# Altium PCB MasterBoard.PcbDoc
Units mm, origin at the board's own origin, x right, y up, seen from the top; angles counter-clockwise.
Board outline 86.59 x 35.41 mm, 2 copper layers (Top Layer, Bottom Layer); 15 components, 18 nets, 76 pads, 11 vias.
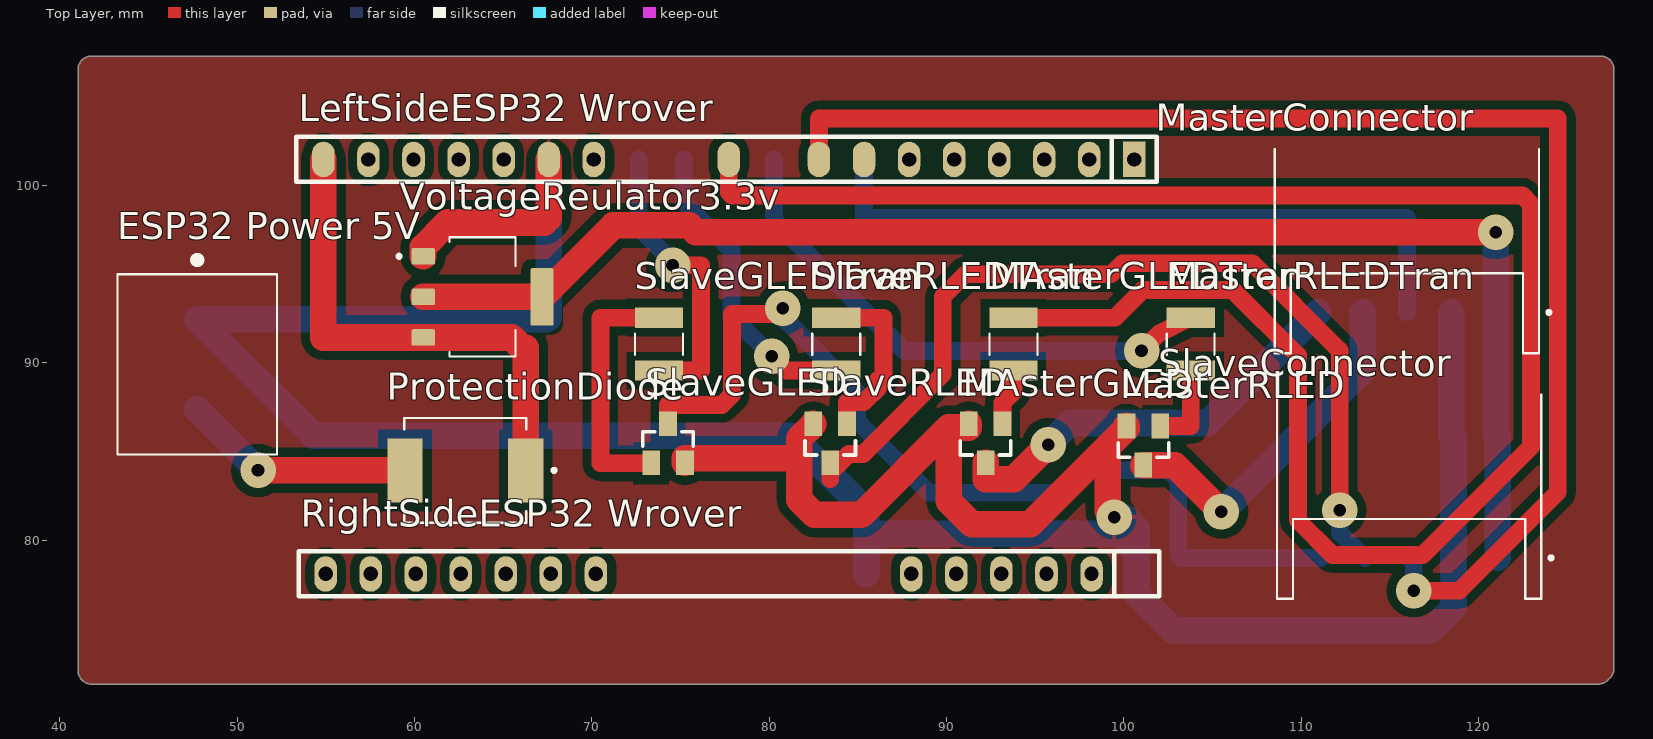
[diagram p0: Top Layer view]
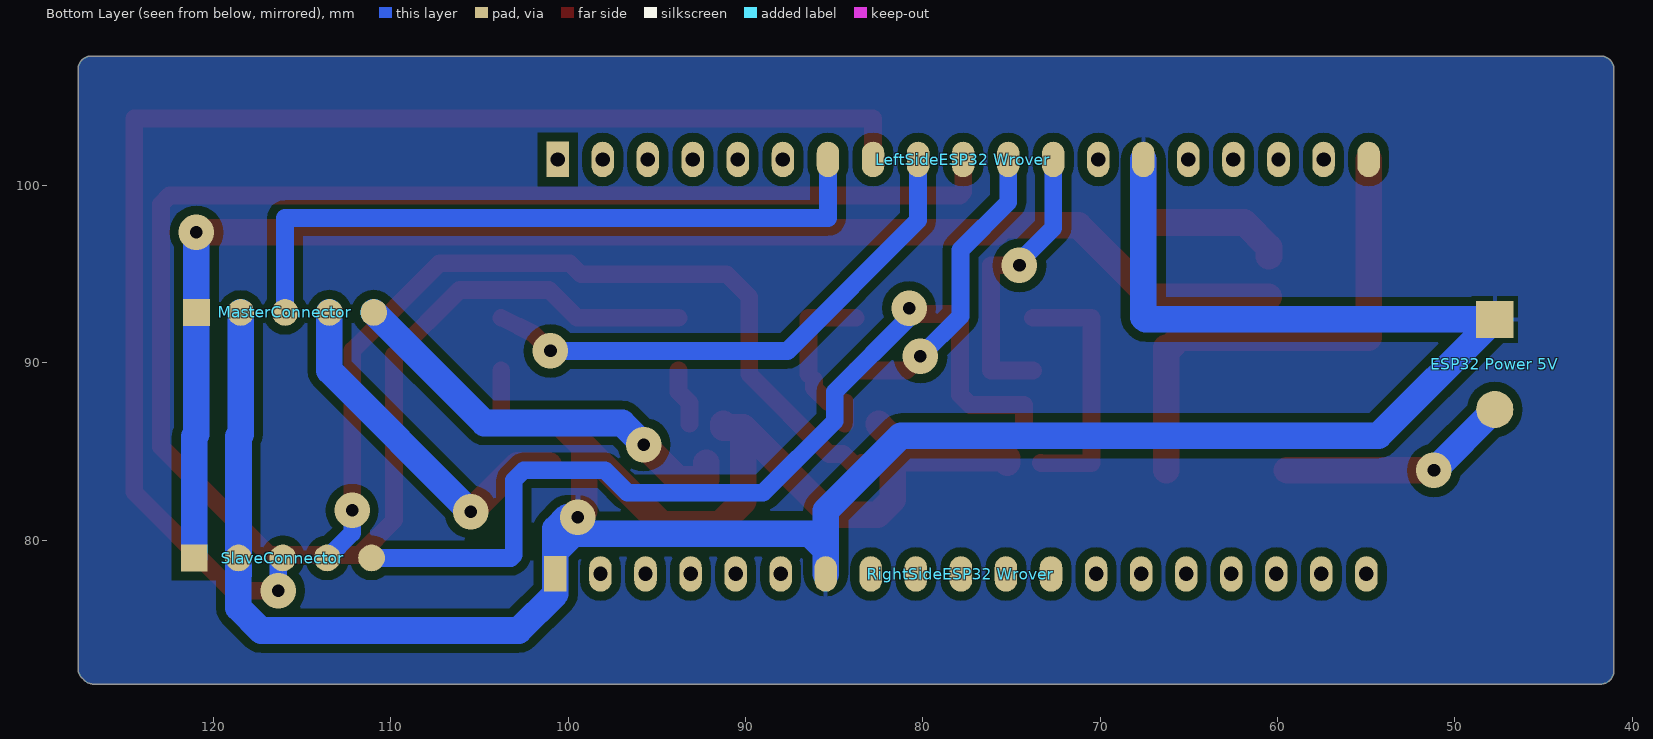
[diagram p1: Bottom Layer view, seen from below]
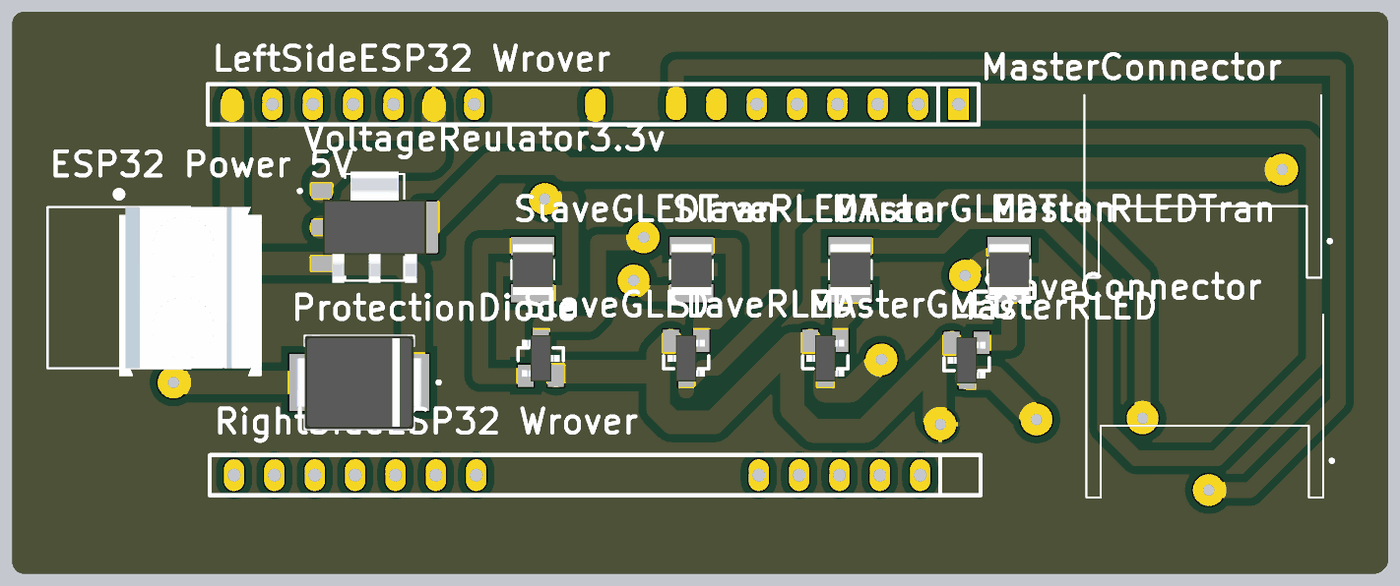
[diagram p2: 3D render of the assembled board from above, using the file's embedded part models]

## Layer stack, top to bottom
Top Solder: solder mask 0.0102, Solder Resist, Dk 3.5
Top Layer: signal copper 0.0356
Dielectric 1: dielectric 0.32, FR-4, Dk 4.8
Bottom Layer: signal copper 0.0356
Bottom Solder: solder mask 0.0102, Solder Resist, Dk 3.5

## Board outline
41.783,71.894 cw(c41.783,72.644) 41.033,72.644 41.033,106.553 cw(c41.783,106.553) 41.783,107.303 126.873,107.303 cw(c126.873,106.553) 127.623,106.553 127.623,72.771 cw(c126.873,72.771) 127.336,72.181 cw(c126.746,72.644) 126.746,71.894

## Design rules (kind name [scope] priority, off if disabled: settings)
Clearance [All] p1: gap=0.5 ignorepadtopadclearanceinfootprint=FALSE
PolygonConnect [All] p1: connectstyle=Relief reliefconductorwidth=0.254 reliefentries=4 polygonreliefangle="90 Angle" airgapwidth=0.254
RoomDefinition MasterBoard [InComponentClass('MasterBoard')] p1: confinementstyle=ConfineIn formatcopy=TRUE lockcomponents=FALSE outline 178.943,27.051 201.168,27.051 201.168,39.751 178.943,39.751
RoutingCorners [All] p1: cornerstyle=90-Degree minsetback=2.54 maxsetback=2.54
RoutingVias [All] p1: holewidth=0.711 width=2 viastyle="Through Hole" minholewidth=0.711 minwidth=2 maxholewidth=0.711 maxwidth=2
SolderMaskExpansion [All] p1: expansion=0.102
UnRoutedNet [All] p1: checkbadconnections=TRUE
Width +5 [InNet('+5')] p1: maxlimit=1.5 minlimit=1.5 preferedwidth=1.5
Width RLEDTerm [InNet('PodeMasterRLEDTerm')] p2: maxlimit=1.5 minlimit=1.5 preferedwidth=1.5
Width GLEDTerm [InNet('PodeMasterGLEDTerm')] p3: maxlimit=1.5 minlimit=1.5 preferedwidth=1.5
Width Diode5V [InNet('Diode5V')] p4: maxlimit=1.5 minlimit=1.5 preferedwidth=1.5
Width 3.3Power [InNet('3.3VPower')] p5: maxlimit=1.5 minlimit=1.5 preferedwidth=1.5
Width GND [InNet('GND')] p6: maxlimit=1.5 minlimit=1.5 preferedwidth=1.5
Width [All] p7: maxlimit=1 minlimit=1 preferedwidth=1
28 further rules are at their usual default settings.

## Components (designator, comment, footprint, x,y, rotation, side; value= is the part's Value field where it differs from the comment)
"ESP32 Power 5V" "282841-2" TE_282841-2 47.752,89.916 r270 top
"LeftSideESP32 Wrover" "LeftSideEsp" SIP19#1 100.584,101.473 r180 top
MasterConnector "S5B-XH-A" JST_S5B-XH-A 115.951,98.552 r180 top
MAsterGLED "SI2302" SOT23 92.202,85.471 r180 top
MAsterGLEDTran "ERJ-14YJ2R0U" RESC3225X70N 93.768,91.059 r270 top
MasterRLED "SI2302" SOT23 101.092,85.344 r180 top
MasterRLEDTran "ERJ-14YJ2R0U" RESC3225X70N 103.759,91.059 r270 top
ProtectionDiode "SS34" DIO_SS34 62.865,83.947 r180 top
"RightSideESP32 Wrover" "RightSideEsp" SIP19#2 100.711,78.105 r180 top
SlaveConnector "S5B-XH-A" JST_S5B-XH-A 116.078,84.709 r180 top
SlaveGLED "SI2302" SOT23 74.295,85.471 r0 top
SlaveGLEDTran "ERJ-14YJ2R0U" RESC3225X70N 73.787,91.059 r90 top
SlaveRLED "SI2302" SOT23 83.439,85.471 r180 top
SlaveRLEDTran "ERJ-14YJ2R0U" RESC3225X70N 83.778,91.059 r90 top
VoltageReulator3.3v "AMS1117" SOT229P700X180-4N 63.838,93.726 r0 top

## Footprints (in the part's own frame and the unit in brackets; to place one, negate y for a bottom-side part, rotate by r counter-clockwise, add the part's x,y. Pads: shape width x height; smd on the part's side, far side on the other; paste and mask are expansions set on the pad)
DIO_SS34 [mm]
  rect 2x3.6 smd: A(3.4,0) C(-3.4,0)
  silkscreen extent -5.1,-2.95 3.44,2.95, body extent -3.98,-2.95 3.98,2.95, height 2.65
JST_S5B-XH-A [mm]
  rect 1.508x1.508 smd far side: 1(-5,5.7)
  round 1.508 smd far side: 2(-2.5,5.7) 3(0,5.7) 4(2.5,5.7) 5(5,5.7)
  silkscreen extent -8.1,-3.5 7.45,8
RESC3225X70N [mm]
  rect 1.14x2.72 smd: 1(-1.49,0) 2(1.49,0)
  silkscreen extent -0.6,-1.35 0.6,1.35, body extent -1.6,-1.25 1.6,1.25, height 0.7
SIP19#1 [mm]
  rect 1.27x2 hole 0.813: 1(0,0)
  oval 1.27x2 hole 0.813: 2(2.54,0) 3(5.08,0) 4(7.62,0) 5(10.16,0) 6(12.7,0) 13(30.48,0) 15(35.56,0) 16(38.1,0) 17(40.64,0) 18(43.18,0)
  oval 1.27x2 all layers, no hole: 7(15.24,0) 8(17.78,0) 10(22.86,0) 14(33.02,0) 19(45.72,0)
  oval 1.27x2 smd far side: 9(20.32,0) 11(25.4,0) 12(27.94,0)
  silkscreen extent -1.27,-1.27 47.24,1.27
SIP19#2 [mm]
  rect 1.27x2 smd far side: 1(0,0)
  oval 1.27x2 hole 0.813: 2(2.54,0) 3(5.08,0) 4(7.62,0) 5(10.16,0) 6(12.7,0) 13(30.48,0) 14(33.02,0) 15(35.56,0) 16(38.1,0) 17(40.64,0) 18(43.18,0) 19(45.72,0)
  oval 1.27x2 smd far side: 7(15.24,0) 8(17.78,0) 9(20.32,0) 10(22.86,0) 11(25.4,0) 12(27.94,0)
  silkscreen extent -1.27,-1.27 47.24,1.27
SOT23 [mm]
  rect 1x1.4 smd: 1(-0.95,-1.1) 2(0.95,-1.1) 3(0,1.1)
  silkscreen extent -1.42,-0.15 1.42,0.66, body extent -1.18,-1.46 1.18,1.46, height 1.12
SOT229P700X180-4N [mm]
  rrect15% 1.31x0.93 smd: 1(-3.345,2.29) 2(-3.345,0) 3(-3.345,-2.29)
  rrect15% 1.31x3.24 smd: 4(3.345,0)
  silkscreen extent -4.8,-3.36 1.86,3.36, body extent -3.25,-3.5 3.25,3.5, height 1.8
TE_282841-2 [mm]
  rect 2.1x2.1 smd far side: 1(-2.54,0)
  round 2.1 smd far side: 2(2.54,0)
  silkscreen extent -6.09,-4.5 5.08,4.5, body extent -5.08,0 5.58,9, height 15.2

## Part data
"ESP32 Power 5V": "TERM BLOCK 2POS SIDE ENT 5.08MM", Package=None, Availability=Unavailable, MF="{'manufacturer': u'TE Connectivity'}", MP=282841-2, Price=None
"LeftSideESP32 Wrover" "RightSideESP32 Wrover": library part "HEADER 19"
MasterConnector ProtectionDiode SlaveConnector: Package=None, Availability=Unavailable, Price=None
  MasterConnector SlaveConnector: MF="{'manufacturer': u'JST'}", MP=S5B-XH-A
  ProtectionDiode: MF="{'manufacturer': u'Taiwan Semiconductor'}", MP=SS34
MAsterGLED MasterRLED SlaveGLED SlaveRLED: "MOSFET N-Channel 20 V (D-S)", Package=None, Availability=Unavailable, MF="{'manufacturer': u'Vishay Siliconix'}", MP=SI2302, Price=None
MAsterGLEDTran MasterRLEDTran SlaveGLEDTran SlaveRLEDTran: "THICK FILM RESISTOR, 1210, 2OHM, 5%, 500mW", Package=None, Availability=Unavailable, MF="{'manufacturer': u'Panasonic'}", MP=ERJ-14YJ2R0U, Price=None
VoltageReulator3.3v: "Sot223/Pkg 1-Amp 5-Volt Low Drop Out Voltage Regulatator", Package=None, Availability=Unavailable, MF="{'manufacturer': u'Advanced Monolithic Systems'}", MP=AMS1117, Price=None

## Via types
v1: diameter 2, hole 0.711, Top Layer to Bottom Layer, 11 vias

## Nets (pads, with @x,y where several pads share a name; then routed paths per layer and width w, separated by ;. In a path a pad name is that pad's centre, name@x,y a point inside that pad or via, vN(x,y) a via of type N, cw(c..) or ccw(c..) an arc to the next point about the centre after c; other vN are vias at no path point)
3.3VPower: MasterConnector.1 SlaveConnector.1 VoltageReulator3.3v.2 VoltageReulator3.3v.4 | length 80.7
  Top Layer w1.5: VoltageReulator3.3v.2 VoltageReulator3.3v.4 71.211,97.754 75.481,97.754 75.866,97.369 120.944,97.369 v1(120.951,97.362)
  Bottom Layer w1.5: v1(120.951,97.362) MasterConnector.1 120.951,85.979 121.078,85.852 SlaveConnector.1
+5: "ESP32 Power 5V.2" ProtectionDiode.A | length 13.1
  Top Layer w1.5: v1(51.181,83.947) ProtectionDiode.A
  Bottom Layer w1.5: 47.752,87.376 v1(51.181,83.947)
Diode5V: "LeftSideESP32 Wrover.19" ProtectionDiode.C VoltageReulator3.3v.3 | length 28.6
  Top Layer w1.5: 54.864,101.473 54.864,91.436 VoltageReulator3.3v.3 65.488,91.436 66.068,90.856 66.265,90.856 ProtectionDiode.C
GND: "ESP32 Power 5V.1" "LeftSideESP32 Wrover.14" "RightSideESP32 Wrover.1" "RightSideESP32 Wrover.7" MasterConnector.2 MAsterGLED.2 MasterRLED.2 SlaveConnector.2 SlaveGLED.2 SlaveRLED.2 VoltageReulator3.3v.1 | length 188
  Top Layer w1.5: VoltageReulator3.3v.1 60.477,96.016 60.477,96.52 61.874,97.917 67.31,97.917 67.564,98.171 67.564,101.473 ; SlaveGLED.2 75.245,84.633 81.686,84.633 ; SlaveRLED.2 82.489,86.538 81.686,85.735 81.686,84.633 ; MAsterGLED.2 91.252,86.36 90.119,86.36 ; v1(99.441,81.305) 99.092,81.654 99.092,85.285 ; MasterRLED.2 100.142,86.335 99.092,85.285 ; 81.686,84.633 81.686,82.296 82.55,81.432 85.192,81.432 90.119,86.36 ; 90.119,86.36 90.119,82.22 91.44,80.899 94.706,80.899 99.092,85.285
  Bottom Layer w1.5: 67.564,101.473 67.564,92.583 67.437,92.456 47.752,92.456 54.305,85.903 81.229,85.903 85.471,81.661 85.471,79.477 ; 85.471,78.105 85.471,79.477 ; v1(99.441,81.305) 100.051,81.305 100.711,80.645 100.711,79.375 ; MasterConnector.2 118.451,85.979 118.578,85.852 SlaveConnector.2 118.578,78.094 118.582,78.09 118.582,76.2 117.297,74.915 102.783,74.915 100.711,76.987 100.711,78.105 100.711,79.375 ; 85.471,79.477 86.36,80.366 99.72,80.366 100.711,79.375
PodeMasterGLED: "LeftSideESP32 Wrover.10" MAsterGLEDTran.1 | length 105
  Top Layer w1: 77.724,101.473 77.724,99.619 77.902,99.441 122.462,99.441 122.951,98.952 122.951,85.283 116.84,79.172 111.76,79.172 109.804,81.128 109.804,90.434 106.119,94.119 101.06,94.119 99.49,92.549 MAsterGLEDTran.1
PodeMasterGLEDTerm: MasterConnector.5 MAsterGLED.3 | length 23.6
  Top Layer w1.5: MAsterGLED.3 92.202,83.439 93.777,83.439 v1(95.733,85.395)
  Bottom Layer w1.5: v1(95.733,85.395) 96.952,86.614 104.713,86.614 MasterConnector.5
PodeMasterGLEDTran: MAsterGLED.1 MAsterGLEDTran.2 | length 3.3
  Top Layer w1: MAsterGLED.1 93.152,87.757 93.768,88.373 MAsterGLEDTran.2
PodeMasterMS: "LeftSideESP32 Wrover.7" MasterConnector.3 | length 39.2
  Bottom Layer w1: 85.344,101.473 85.344,98.171 115.951,98.171 MasterConnector.3
PodeMasterRLED: "LeftSideESP32 Wrover.9" MasterRLEDTran.1 | length 30.6
  Top Layer w1: v1(100.99,90.678) 101.981,91.669 MasterRLEDTran.1
  Bottom Layer w1: 80.264,101.473 80.264,98.044 87.63,90.678 v1(100.99,90.678)
PodeMasterRLEDTerm: MasterConnector.4 MasterRLED.3 | length 20
  Top Layer w1.5: MasterRLED.3 102.852,84.244 v1(105.486,81.61)
  Bottom Layer w1.5: v1(105.486,81.61) 113.451,89.575 MasterConnector.4
PodeMasterRLEDTran: MasterRLED.1 MasterRLEDTran.2 | length 4.8
  Top Layer w1: MasterRLED.1 103.759,86.444 MasterRLEDTran.2
PodeSlaveGLED: "LeftSideESP32 Wrover.12" SlaveGLEDTran.1 | length 16.7
  Top Layer w1: SlaveGLEDTran.1 76.149,89.569 76.149,95.504 v1(74.549,95.504)
  Bottom Layer w1: 72.644,101.473 72.644,97.612 74.549,95.707 v1(74.549,95.504)
PodeSlaveGLEDTerm: SlaveConnector.5 SlaveGLED.3 | length 53.4
  Top Layer w1: SlaveGLED.3 74.295,87.63 77.318,87.63 77.902,88.214 77.902,92.765 80.446,92.765 v1(80.772,93.091)
  Bottom Layer w1: v1(80.772,93.091) 80.772,92.567 84.963,88.376 84.963,86.719 89.005,82.677 96.647,82.677 97.917,83.947 102.489,83.947 103.054,83.382 103.054,79.177 103.221,79.009 SlaveConnector.5
PodeSlaveGLEDTran: SlaveGLED.1 SlaveGLEDTran.2 | length 14.4
  Top Layer w1: SlaveGLED.1 73.345,84.353 70.485,84.353 70.485,92.549 SlaveGLEDTran.2
PodeSlaveMS: "LeftSideESP32 Wrover.8" SlaveConnector.3 | length 77.4
  Top Layer w1: 82.804,101.473 82.804,103.784 124.451,103.784 124.451,82.719 118.897,77.165 v1(116.332,77.165)
  Bottom Layer w1: SlaveConnector.3 116.332,78.755 v1(116.332,77.165)
PodeSlaveRLED: "LeftSideESP32 Wrover.11" SlaveRLEDTran.1 | length 17.1
  Top Layer w1: v1(80.137,90.373) 80.941,89.569 SlaveRLEDTran.1
  Bottom Layer w1: 75.184,101.473 75.184,99.06 77.876,96.368 77.876,92.634 v1(80.137,90.373)
PodeSlaveRLEDTerm: SlaveConnector.4 SlaveRLED.3 | length 51.4
  Top Layer w1: 83.439,83.439 SlaveRLED.3@83.439,83.82 ; SlaveRLED.3 SlaveRLED.3@83.439,83.82 ; v1(112.166,81.686) 112.166,90.696 107.244,95.619 99.899,95.619 99.276,94.996 91.059,94.996 89.789,93.726 89.789,89.357 85.303,84.871 84.49,84.871 SlaveRLED.3@83.439,83.82
  Bottom Layer w1: v1(112.166,81.686) 112.166,80.421 SlaveConnector.4
PodeSlaveRLEDTran: SlaveRLED.1 SlaveRLEDTran.2 | length 10
  Top Layer w1: SlaveRLEDTran.2 86.436,92.549 86.436,89.357 86.138,89.059 86.138,88.585 85.335,87.782 84.389,87.782 SlaveRLED.1
pads on no net: "LeftSideESP32 Wrover.1" "LeftSideESP32 Wrover.2" "LeftSideESP32 Wrover.3" "LeftSideESP32 Wrover.4" "LeftSideESP32 Wrover.5" "LeftSideESP32 Wrover.6" "LeftSideESP32 Wrover.13" "LeftSideESP32 Wrover.15" "LeftSideESP32 Wrover.16" "LeftSideESP32 Wrover.17" "LeftSideESP32 Wrover.18" "RightSideESP32 Wrover.2" "RightSideESP32 Wrover.3" "RightSideESP32 Wrover.4" "RightSideESP32 Wrover.5" "RightSideESP32 Wrover.6" "RightSideESP32 Wrover.8" "RightSideESP32 Wrover.9" "RightSideESP32 Wrover.10" "RightSideESP32 Wrover.11" "RightSideESP32 Wrover.12" "RightSideESP32 Wrover.13" "RightSideESP32 Wrover.14" "RightSideESP32 Wrover.15" "RightSideESP32 Wrover.16" "RightSideESP32 Wrover.17" "RightSideESP32 Wrover.18" "RightSideESP32 Wrover.19"
copper on no net: | length 0.4
  Bottom Layer w0.2: 77.724,101.092 77.724,101.473

## Polygon pours and split planes (outlines as drawn)
GND on Top Layer "Top Layer-No Net" (solid, pour order 4): 41.783,71.894 cw(c41.783,72.644) 41.033,72.644 41.033,106.553 cw(c41.783,106.553) 41.783,107.303 126.873,107.303 cw(c126.873,106.553) 127.623,106.553 127.623,72.771 cw(c126.873,72.771) 127.336,72.181 cw(c126.746,72.644) 126.746,71.894
GND on Bottom Layer "Top Layer-No Net1" (solid, pour order 5): 41.783,71.894 cw(c41.783,72.644) 41.033,72.644 41.033,106.553 cw(c41.783,106.553) 41.783,107.303 126.873,107.303 cw(c126.873,106.553) 127.623,106.553 127.623,72.771 cw(c126.873,72.771) 127.336,72.181 cw(c126.746,72.644) 126.746,71.894

## Keep-outs
Top Layer:
  region: 126.238,105.664

## Silkscreen, mask and mechanical layers (free items; w line width, h text height)
Mechanical 1:
  region: 47.879,104.013
  region: 46.863,103.251
  region: 45.212,102.489
  lines w0.254: 53.238,78.767 53.746,77.243 ; 53.238,101.019 53.746,102.543 ; 53.492,77.243 54,77.243 ; 53.492,102.543 54,102.543 ; 53.746,83.392 53.746,77.243 ; 53.746,96.393 53.746,102.543 ; 54.254,78.767 53.746,77.243 ; 54.254,101.019 53.746,102.543
  text "25.3 (mm)" at 52.832,96.139 h1.52 r270
Mechanical 13:
  lines w1.5: 41.783,72.644 41.783,106.553 126.873,106.553 126.873,72.771 126.746,72.644 41.783,72.644

## Text inside footprints (layer, text, board x,y; h text height)
MasterConnector: Mechanical 13 "PCB Edge" at 108.033,101.755 h0.81 r180
SlaveConnector: Mechanical 13 "PCB Edge" at 108.16,87.912 h0.81 r180